# EAGLE board encoder-testerB (EAGLE 6.6.0)
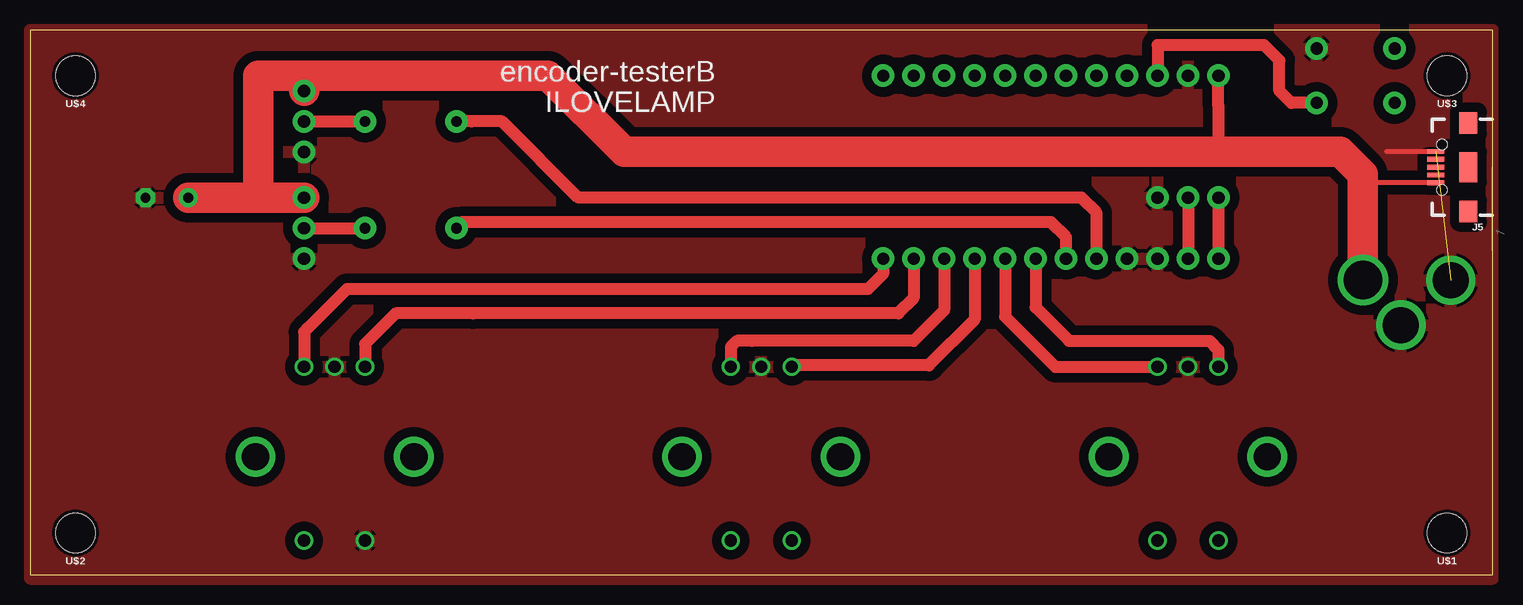
[diagram p0: board, top side]
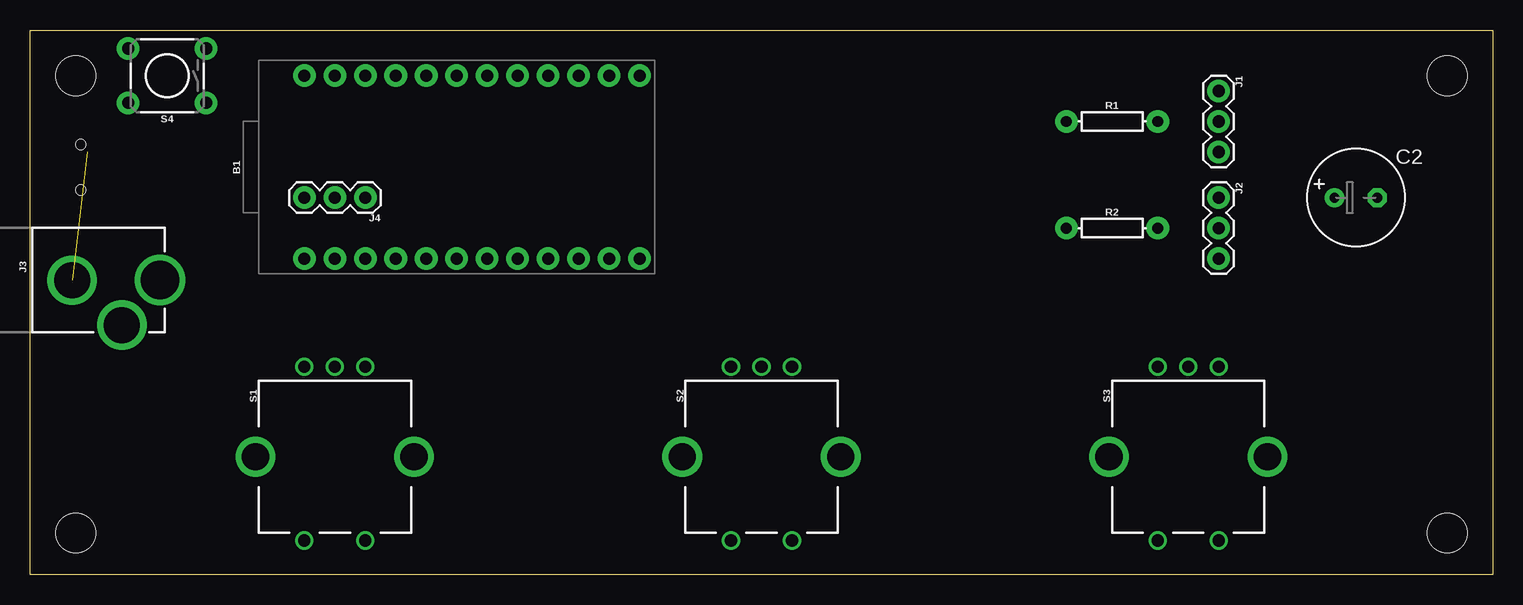
[diagram p1: board, bottom side, seen from below]

Size 121.9 x 45.39 mm. Coordinates in mm from the lower left corner, seen from the top.
Outline: 121.9,45.39 0,45.39 0,0 121.9,0 121.9,45.39
Copper layers (1*16): Top 0.035mm / dielectric 1.5mm / Bottom 0.035mm
Design rules "OthermillDRC_1_32_v2": minimum track width 8mil, minimum drill 0.8mm, track to track 0.794003125mm, track to pad 0.794003125mm, pad to pad 0.794003125mm, via to via 0.794003125mm, smd to smd 0mil, copper to edge 0mil, drill to drill 1mil, minimum pad ring 10mil, minimum via ring 10mil, stop-mask expansion 1mil, vias tented up to drill 30mil, thermal gap 10mil

## Footprints (pad centres in the part's own frame; a part is rotated, then mirrored left to right if it is on the bottom)
SPARKFUN_PRO_MICRO = drill 1.016 pad 1.88: 1 -7.62,12.7; 2 -7.62,10.16; 3 -7.62,7.62; 4 -7.62,5.08; 5 -7.62,2.54; 6 -7.62,0; 7 -7.62,-2.54; 8 -7.62,-5.08; 9 -7.62,-7.62; 10 -7.62,-10.16; 11 -7.62,-12.7; 12 -7.62,-15.24; 13 7.62,-15.24; 14 7.62,-12.7; 15 7.62,-10.16; 16 7.62,-7.62; 17 7.62,-5.08; 18 7.62,-2.54; 19 7.62,0; 20 7.62,2.54; 21 7.62,5.08; 22 7.62,7.62; 23 7.62,10.16; 24 7.62,12.7
E3,5-8 = drill 0.813 pad 1.6: + -1.778,0 | drill 0.813 pad 1.6 octagon: - 1.778,0
1X03 = drill 1.016 pad 1.88: 1 0,0; 2 2.54,0; 3 5.08,0
POWER_JACK_PTH_LOCK = drill 2.997 pad 4.115: GND 0.025,6.557; GNDBREAK 3.762,10.7 | drill 3.2 pad 4.115: PWR 0,13.878
USB-B-MICRO-SMD = smd 1.45 x 0.4: D+ 2.725,0; D- 2.725,0.65; GND 2.725,-1.3; ID 2.725,-0.65; VBUS 2.725,1.3 | smd 1.5 x 1.8: SHIELD1 0,3.685; SHIELD2 0,-3.685 | smd 1.5 x 2.5: SHIELD3 0,0 | hole 0.85: 2.2,1.9; 2.2,-1.9
AXIAL-0.3 = drill 0.9 pad 1.88: P$1 -3.81,0; P$2 3.81,0
ROTARY_ENC_PLAIN = drill 1.016: A 7.493,-2.54; B 7.493,2.54; C 7.493,0; SW+ -6.985,2.54; SW- -6.985,-2.54 | drill 2.286: P$3 0,6.604; P$4 0,-6.604
TACTILE_SWITCH_PTH_6.0MM = drill 1.016 pad 1.88: 1 -3.251,2.261; 2 3.251,2.261; 3 -3.251,-2.261; 4 3.251,-2.261
STAND-OFF = hole 3.302: 0,0

## Placement (x,y rotation side)
B1  SPARKFUN_PRO_MICRO  [SPARKFUN_PRO_MICRO]  86.34,33.96 90 bottom
C2  [E3,5-8]  11.41,31.42 0 bottom
J1  [1X03]  22.84,40.31 270 bottom
J2  [1X03]  22.84,31.42 270 bottom
J3  POWER_JACKPTH_LOCK  [POWER_JACK_PTH_LOCK]  124.95,24.56 270 bottom
J4  [1X03]  93.96,31.42 180 bottom
J5  [USB-B-MICRO-SMD]  119.87,33.96 180 top
R1  1k  [AXIAL-0.3]  31.73,37.77 0 bottom
R2  1k  [AXIAL-0.3]  31.73,28.88 0 bottom
S1  ENCODER-SWITCH  [ROTARY_ENC_PLAIN]  96.5,9.83 90 bottom
S2  ENCODER-SWITCH  [ROTARY_ENC_PLAIN]  60.94,9.83 90 bottom
S3  ENCODER-SWITCH  [ROTARY_ENC_PLAIN]  25.38,9.83 90 bottom
S4  tact6mm  [TACTILE_SWITCH_PTH_6.0MM]  110.47,41.58 180 bottom
U$1  [STAND-OFF]  118.09,3.48 180 top
U$2  [STAND-OFF]  3.79,3.48 180 top
U$3  [STAND-OFF]  118.09,41.58 180 top
U$4  [STAND-OFF]  3.79,41.58 180 top

## Library data of the parts
B1 = SparkFun-Boards
C2 = adafruit
J1 J2 J4 = SparkFun-Connectors
J3 = SparkFun-Connectors; PROD_ID: CONN-08197; SF_ID: PRT-00119
J5 = SparkFun-Connectors; PROD_ID: CONN-11752
R1 R2 = SparkFun-Resistors; PROD_ID: RES-08380
S1-S3 = SparkFun-Switches; SF_SKU: COM-09117
S4 = SparkFun-Switches; PROD_ID: SWCH-08441; SF_SKU: COM-00097
U$1-U$4 = SparkFun-Hardware

## Nets
BUT3: S3.SW-
ENC1A: B1.8 S1.A
ENC1B: B1.7 S1.B
ENC2A: B1.10 S2.A
ENC2B: B1.9 S2.B
ENC3A: B1.12 S3.A
ENC3B: B1.11 S3.B
GND: B1.3 B1.4 B1.23 C2.- J1.3 J2.3 J3.GND J3.GNDBREAK J4.1 J5.GND S1.C S2.C S3.C S3.SW+ S4.3
LED1: B1.5 R1.P$1
LED2: B1.6 R2.P$1
N$1: J1.2 R1.P$2
N$2: J2.2 R2.P$2
N$3: B1.2 J4.2
N$4: B1.1 J4.3
RESET: B1.22 S4.1
VCC: B1.21
VIN: B1.24 C2.+ J1.1 J2.1 J3.PWR J5.VBUS

## Tracks (layer width: path | path; a pad name or v marks a point on that pad's centre or on a via)
ENC1A
  Top 1.016: 93.96,17.45 S1.A 85.45,17.32 81.26,21.51 B1.8
ENC1B
  Top 1.016: B1.7 83.8,22.28 86.59,19.48 90.4,19.48 98.28,19.48 99.04,18.72 S1.B
ENC2A
  Top 1.016: B1.10 76.18,22.02 73.64,19.48 60.18,19.48 58.91,19.48 58.4,18.97 S2.A
ENC2B
  Top 1.016: B1.9 78.72,21.26 74.91,17.45 63.61,17.45 S2.B
ENC3A
  Top 1.016: B1.12 71.1,25.07 69.83,23.8 33.13,23.8 26.4,23.8 23.09,20.5 22.84,20.24 S3.A
ENC3B
  Top 1.016: B1.11 73.64,23.04 72.37,21.77 36.94,21.77 30.46,21.77 27.92,19.23 S3.B
GND  (1 unrouted)
  Top 0.254: 113.04,35.26 113.01,35.23
  Top 0.406: J5.GND 113.04,35.26
  pour Top: -0.02,-0.33 121.9,-0.33 121.9,45.39 -0.02,45.39
LED1
  Top 1.016: B1.5 88.88,30.15 87.61,31.42 45.7,31.42 39.35,37.77 36.81,37.77 R1.P$1
LED2
  Top 1.016: B1.6 86.34,28.12 85.07,29.39 36.05,29.39 R2.P$1
N$1
  Top 1.016: J1.2 R1.P$2
N$2
  Top 1.016: J2.2 R2.P$2
N$3
  Top 1.016: J4.2 B1.2
N$4
  Top 1.016: J4.3 B1.1
RESET
  Top 1.016: S4.1 106.94,39.32 105.11,39.32 104.12,40.31 104.12,42.85 102.85,44.12 102.14,44.12 101.58,44.12 93.96,44.12 B1.22
VIN
  Top 0.254: 111.1,32.66 111.07,32.69
  Top 0.406: J5.VBUS 111.1,32.66
  Top 1.016: B1.24 99.04,39.04 99.04,35.23
  Top 2.54: J3.PWR 111.07,32.69 111.07,33.36 109.2,35.23 104.12,35.23 99.04,35.23 63.48,35.23 49.51,35.23 43.16,41.58 24.11,41.58 22.84,41.58 | 19.03,31.42 19.03,40.31 19.03,41.58 22.84,41.58 | 19.03,31.42 J2.1 | 19.03,31.42 C2.+ | J1.1 22.84,41.58

## Text on the board
tPlace: encoder-testerB | ILOVELAMP